# EAGLE board OCU_Buttons_Adapter_Rev1 (EAGLE 9.6.2)
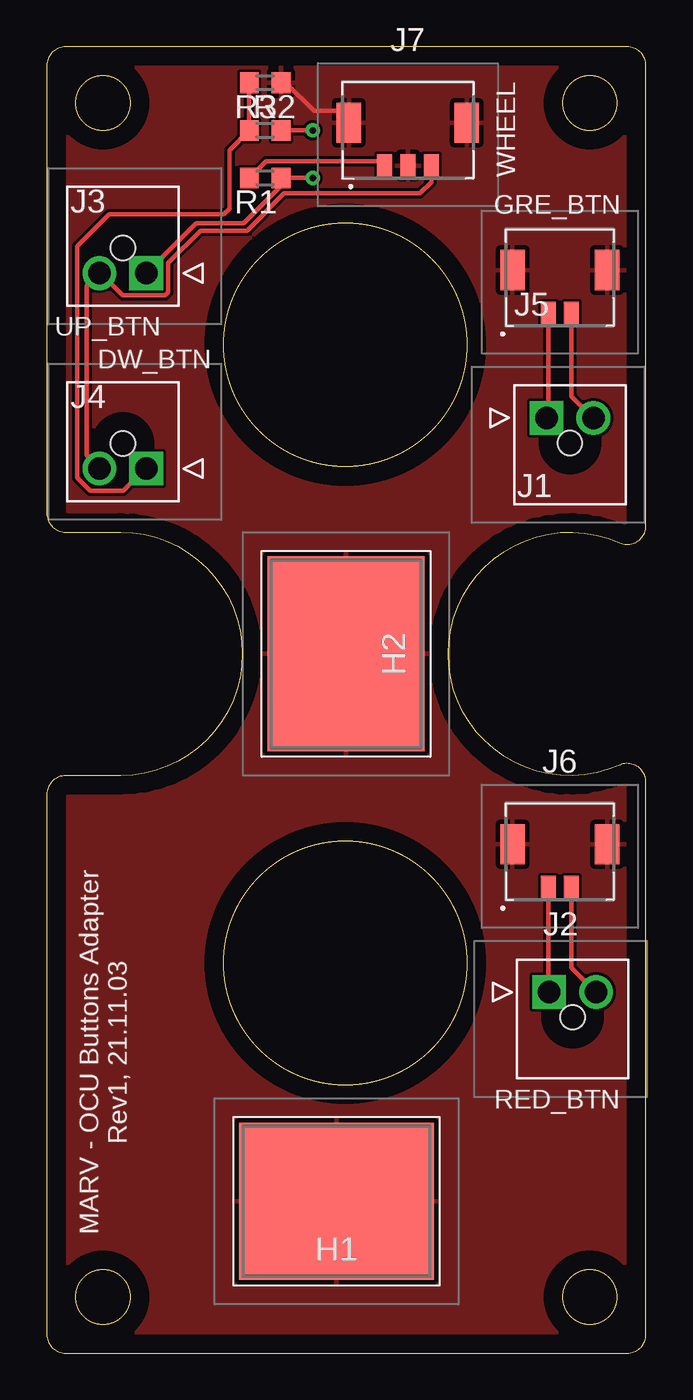
[diagram p0: board, top side]
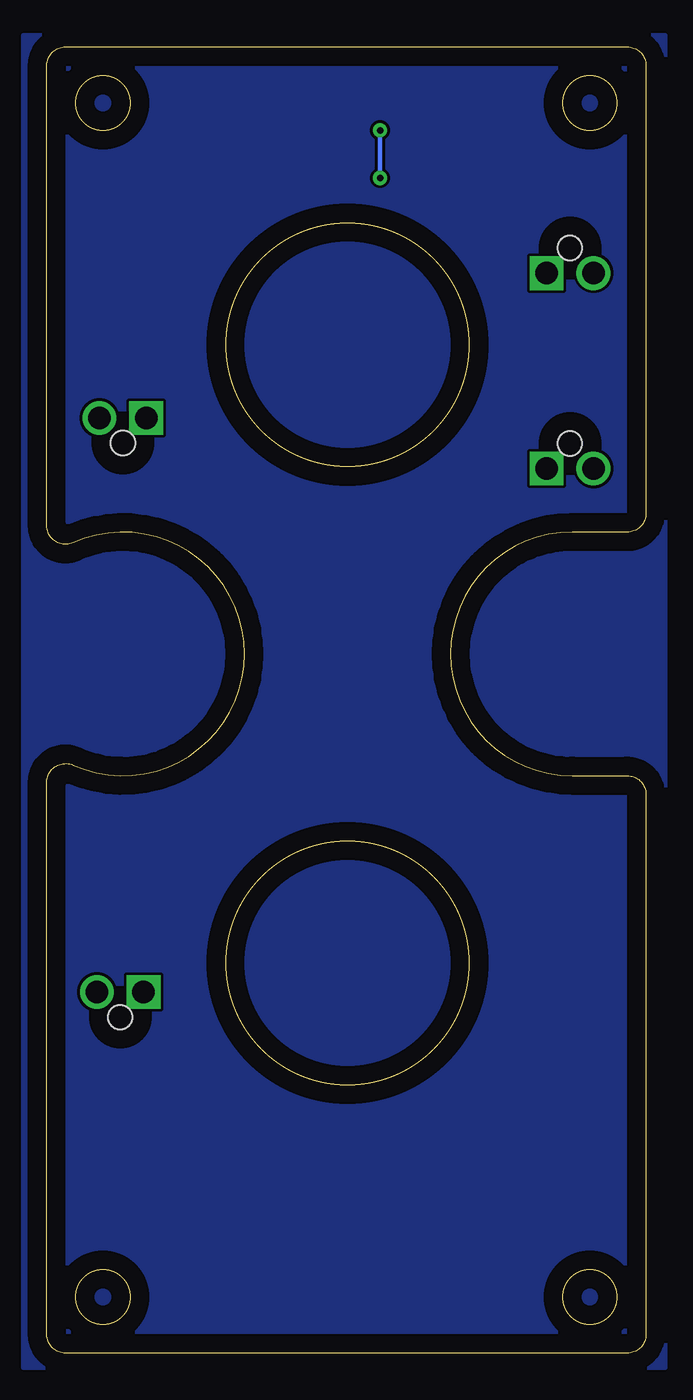
[diagram p1: board, bottom side, seen from below]

Size 32 x 69.72 mm. Coordinates in mm from the lower left corner, seen from the top.
Outline: 32,1 32,30.47 arc114 30.59,31.38 arc-228 30.59,43.25 arc114 32,44.17 32,68.72 arc90 31,69.72 1,69.72 arc90 0,68.72 0,44.82 arc90 1,43.82 3.94,43.82 arc-180 3.94,30.82 1,30.82 arc90 0,29.82 0,1 arc90 1,0 31,0 arc90 32,1
Outline: circle at 15.94,20.82 radius 6.5
Outline: circle at 15.94,53.82 radius 6.5
Outline: circle at 3,66.72 radius 1.45
Outline: circle at 29,66.72 radius 1.45
Outline: circle at 29,3 radius 1.45
Outline: circle at 3,3 radius 1.45
Copper layers (1*16): Top 0.035mm / dielectric 1.5mm / Bottom 0.035mm
Design rules "default": minimum track width 6mil, minimum drill 0.35mm, track to track 6mil, track to pad 6mil, pad to pad 6mil, via to via 6mil, smd to smd 6mil, copper to edge 40mil, drill to drill 6mil, minimum pad ring 10mil, minimum via ring 8mil, stop-mask expansion 4mil, vias tented up to drill 0mil, thermal gap 10mil

## Footprints (pad centres in the part's own frame; a part is rotated, then mirrored left to right if it is on the bottom)
S813146R = smd 10.4 x 8.4: 1 0,0
1053091402 = drill 1.2 pad 1.6 square: 1 0,0 | drill 1.2 pad 1.8: 2 2.5,0 | hole 1.3: 1.25,-1.34
5055680271 = smd 0.8 x 1.2: 1 -0.625,-1.882; 2 0.625,-1.882 | smd 1.3 x 2.15: MP1 -2.525,0.412; MP2 2.525,0.412
5055680371 = smd 0.8 x 1.2: 1 -1.25,-1.882; 2 0,-1.882; 3 1.25,-1.882 | smd 1.3 x 2.15: MP1 -3.15,0.412; MP2 3.15,0.412
R0603 = smd 1 x 1.1: 1 -0.85,0; 2 0.85,0

## Placement (x,y rotation side)
H1  S8131-46R  [S813146R]  15.47,8.11 0 top
H2  S8131-46R  [S813146R]  15.98,37.32 90 top
J1  1053091202  [1053091402]  26.69,49.91 0 top
J2  1053091202  [1053091402]  26.83,19.27 0 top
J3  1053091202  [1053091402]  5.31,57.64 180 top
J4  1053091202  [1053091402]  5.31,47.21 180 top
J5  505567-0271  [5055680271]  27.4,57.39 0 top
J6  505567-0271  [5055680271]  27.4,26.75 0 top
J7  505567-0371  [5055680371]  19.28,65.26 0 top
R1  2K  [R0603]  11.66,62.72 180 top
R2  2K  [R0603]  11.66,65.26 0 top
R3  2K  [R0603]  11.66,67.8 180 top

## Library data of the parts
H1 H2 = RescueRunner; DESCRIPTION: HARWIN - S8131-46R - Fastener, Low Profile PCB, Surface Mount Cable Clamp, 1.8 mm, Copper, Grey, 10 mm, 8 mm; HEIGHT: 3.7mm; MANUFACTURER_NAME: HARWIN; MANUFACTURER_PART_NUMBER: S8131-46R; RS_PART_NUMBER: 7884842P; RS_PRICE-STOCK: http://uk.rs-online.com/web/p/products/7884842P
J1-J4 = 1053091202; DESCRIPTION: Nano-Fit Vertical Header, Through Hole, 2.50mm Pitch, Single Row, with Kinked Pins, Tin (Sn) Plating, Black, Glow-Wire Capable, Tray; HEIGHT: 10.51mm; MANUFACTURER_NAME: Molex; MANUFACTURER_PART_NUMBER: 1053091202
J5-J7 = RescueRunner
R1-R3 = CASE-RCL

## Nets
GND: H1.1 H2.1 J5.MP1 J5.MP2 J6.MP1 J6.MP2 J7.2 J7.MP1 J7.MP2 R3.1
N$1: J1.1 J5.1
N$2: J1.2 J5.2
N$3: J2.1 J6.1
N$4: J2.2 J6.2
N$5: J3.1 R1.1 R2.2
N$6: J4.1 R2.1 R3.2
N$7: J3.2 J4.2 J7.3
N$8: J7.1 R1.2

## Tracks (layer width: path | path; a pad name or v marks a point on that pad's centre or on a via)
GND
  Top 0.25: R3.1 12.76,67.8 14.26,66.3 15.5,66.3 J7.MP1
  pour Top: -1.04,70.34 33.25,70.34 33.25,-0.78 -1.04,-0.78
  pour Bottom: -1.04,70.34 33.25,70.34 33.25,-0.78 -1.04,-0.78
N$1
  Top 0.25: J5.1 26.77,49.99 J1.1
N$2
  Top 0.25: J1.2 28.02,51.07 J5.2
N$3
  Top 0.25: J6.1 26.77,19.32 J2.1
N$4
  Top 0.25: J6.2 28.02,20.57 J2.2
N$5  (via drill 0.35)
  Top 0.25: v14.2,62.72 R1.1 12.51,62.3 10.52,60.3 7.98,60.3 J3.1 | v14.2,65.26 R2.2
  Bottom 0.25: v14.2,62.72 v14.2,65.26
N$6
  Top 0.25: R3.2 R2.1 9.75,64.2 9.75,61.07 9.45,60.77 3.32,60.77 1.63,59.08 1.63,46.72 2.32,46.03 4.08,46.03 5.25,47.21 J4.1
N$7
  Top 0.25: J7.3 20.53,62.48 19.94,61.89 12.67,61.89 10.68,59.9 8.21,59.9 6.49,58.18 6.49,56.62 6.33,56.46 4.05,56.46 2.87,57.64 J3.2 2.14,56.97 2.14,47.93 2.81,47.27 J4.2
N$8
  Top 0.25: R1.2 11.7,63.61 17.8,63.61 J7.1

## Text on the board
tPlace: WHEEL | GRE_BTN | UP_BTN | DW_BTN | MARV - OCU Buttons Adapter / Rev1, 21.11.03 | RED_BTN